# Altium PCB MM_2.0_pcb.PcbDoc (part 1 of 2)
Units mm, origin at the board's own origin, x right, y up, seen from the top; angles counter-clockwise.
Board outline 100 x 100 mm, 4 copper layers (Top_Layer, INT_L1_GND, INT_L2_GND, Bottom_Layer), stack 1.586 mm thick; 74 components, 72 nets, 343 pads, 105 vias.
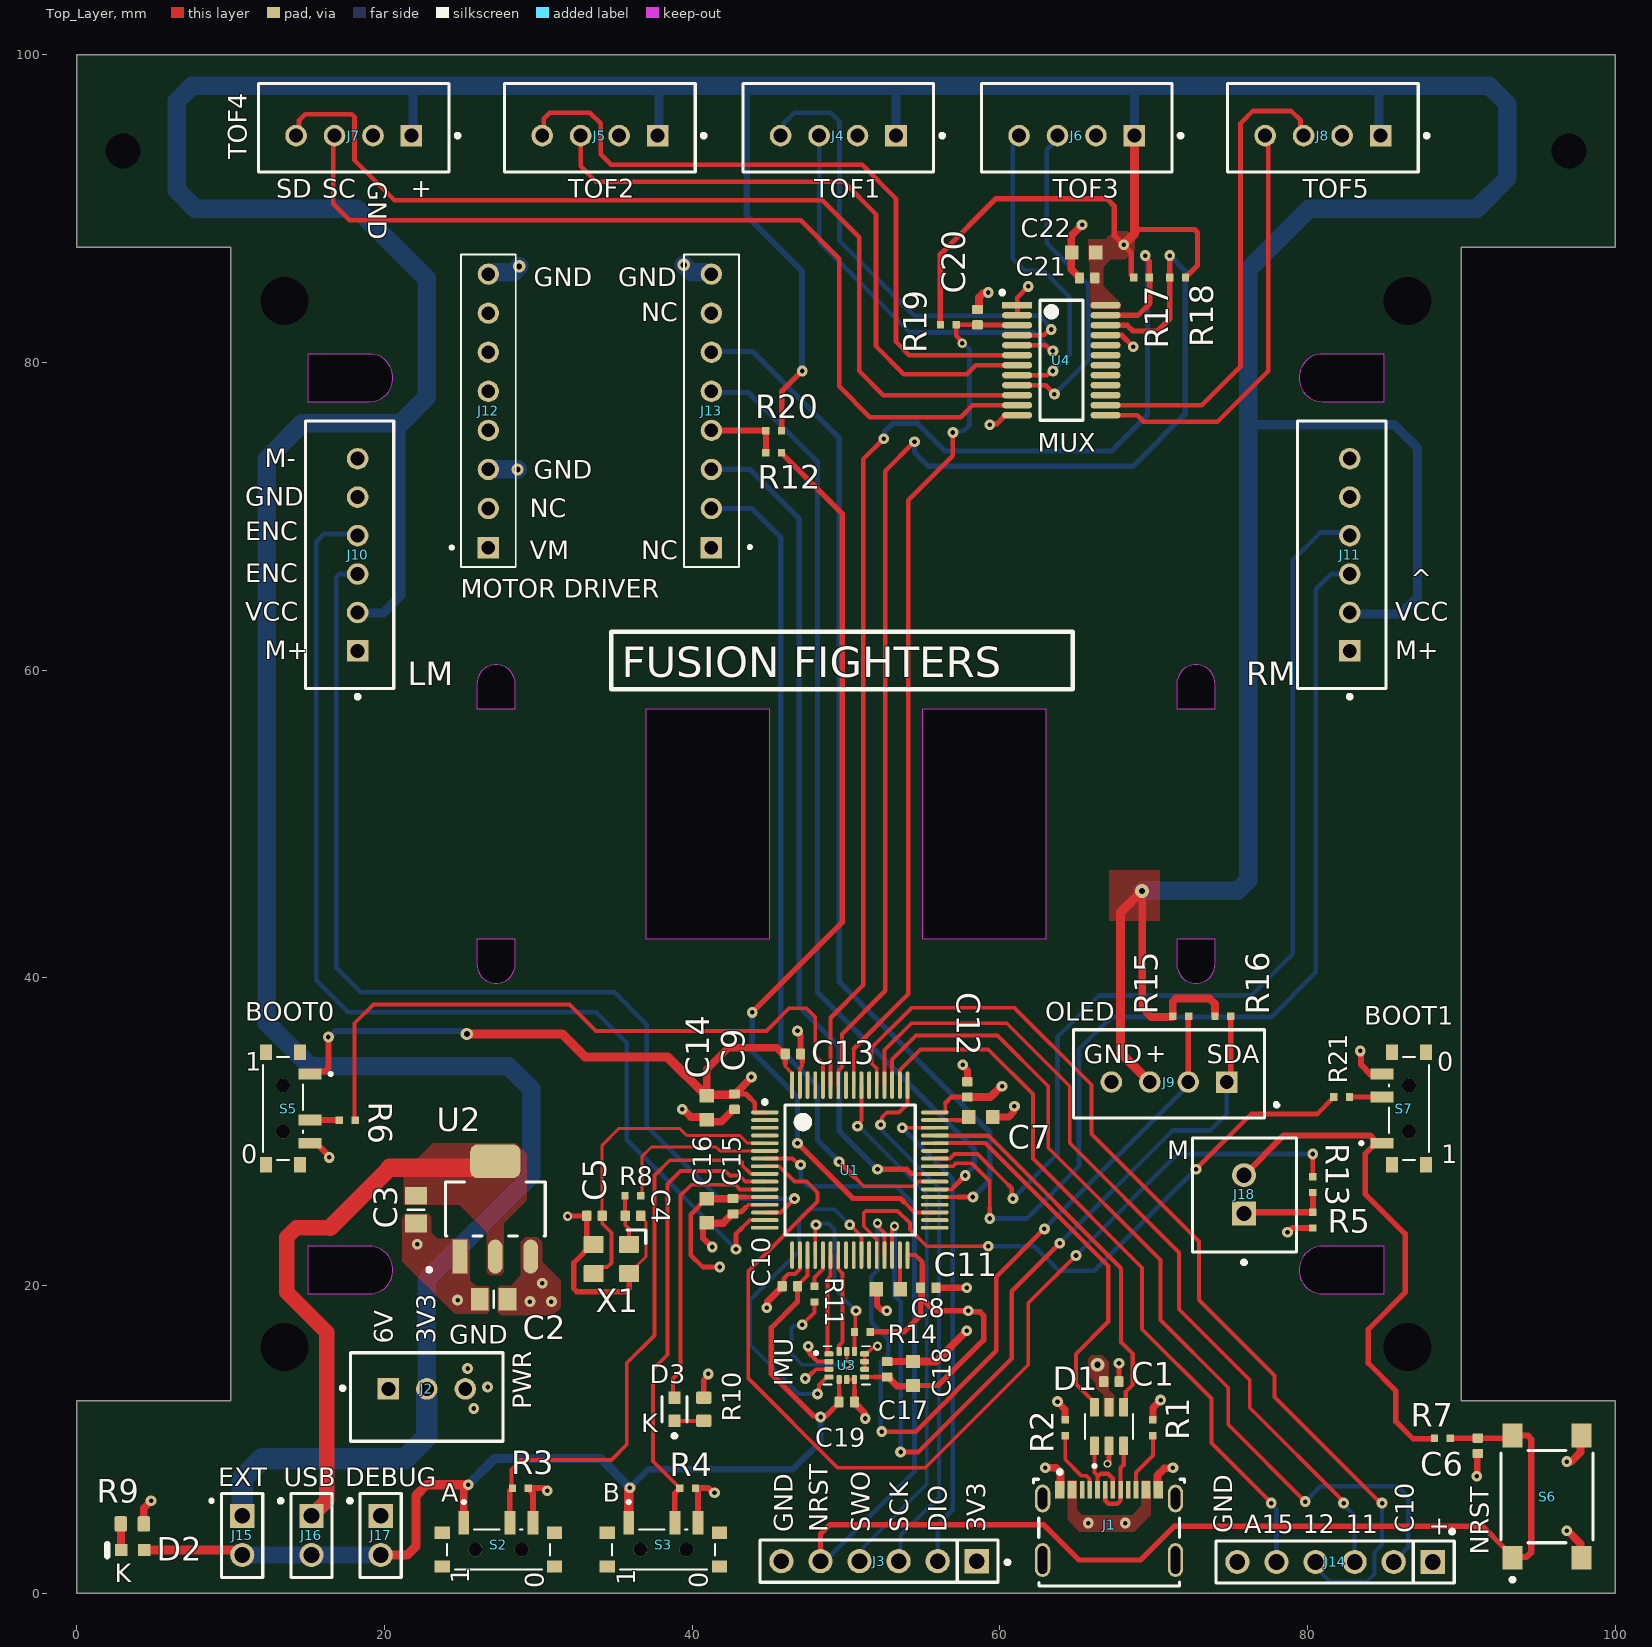
[diagram p0: Top_Layer view]
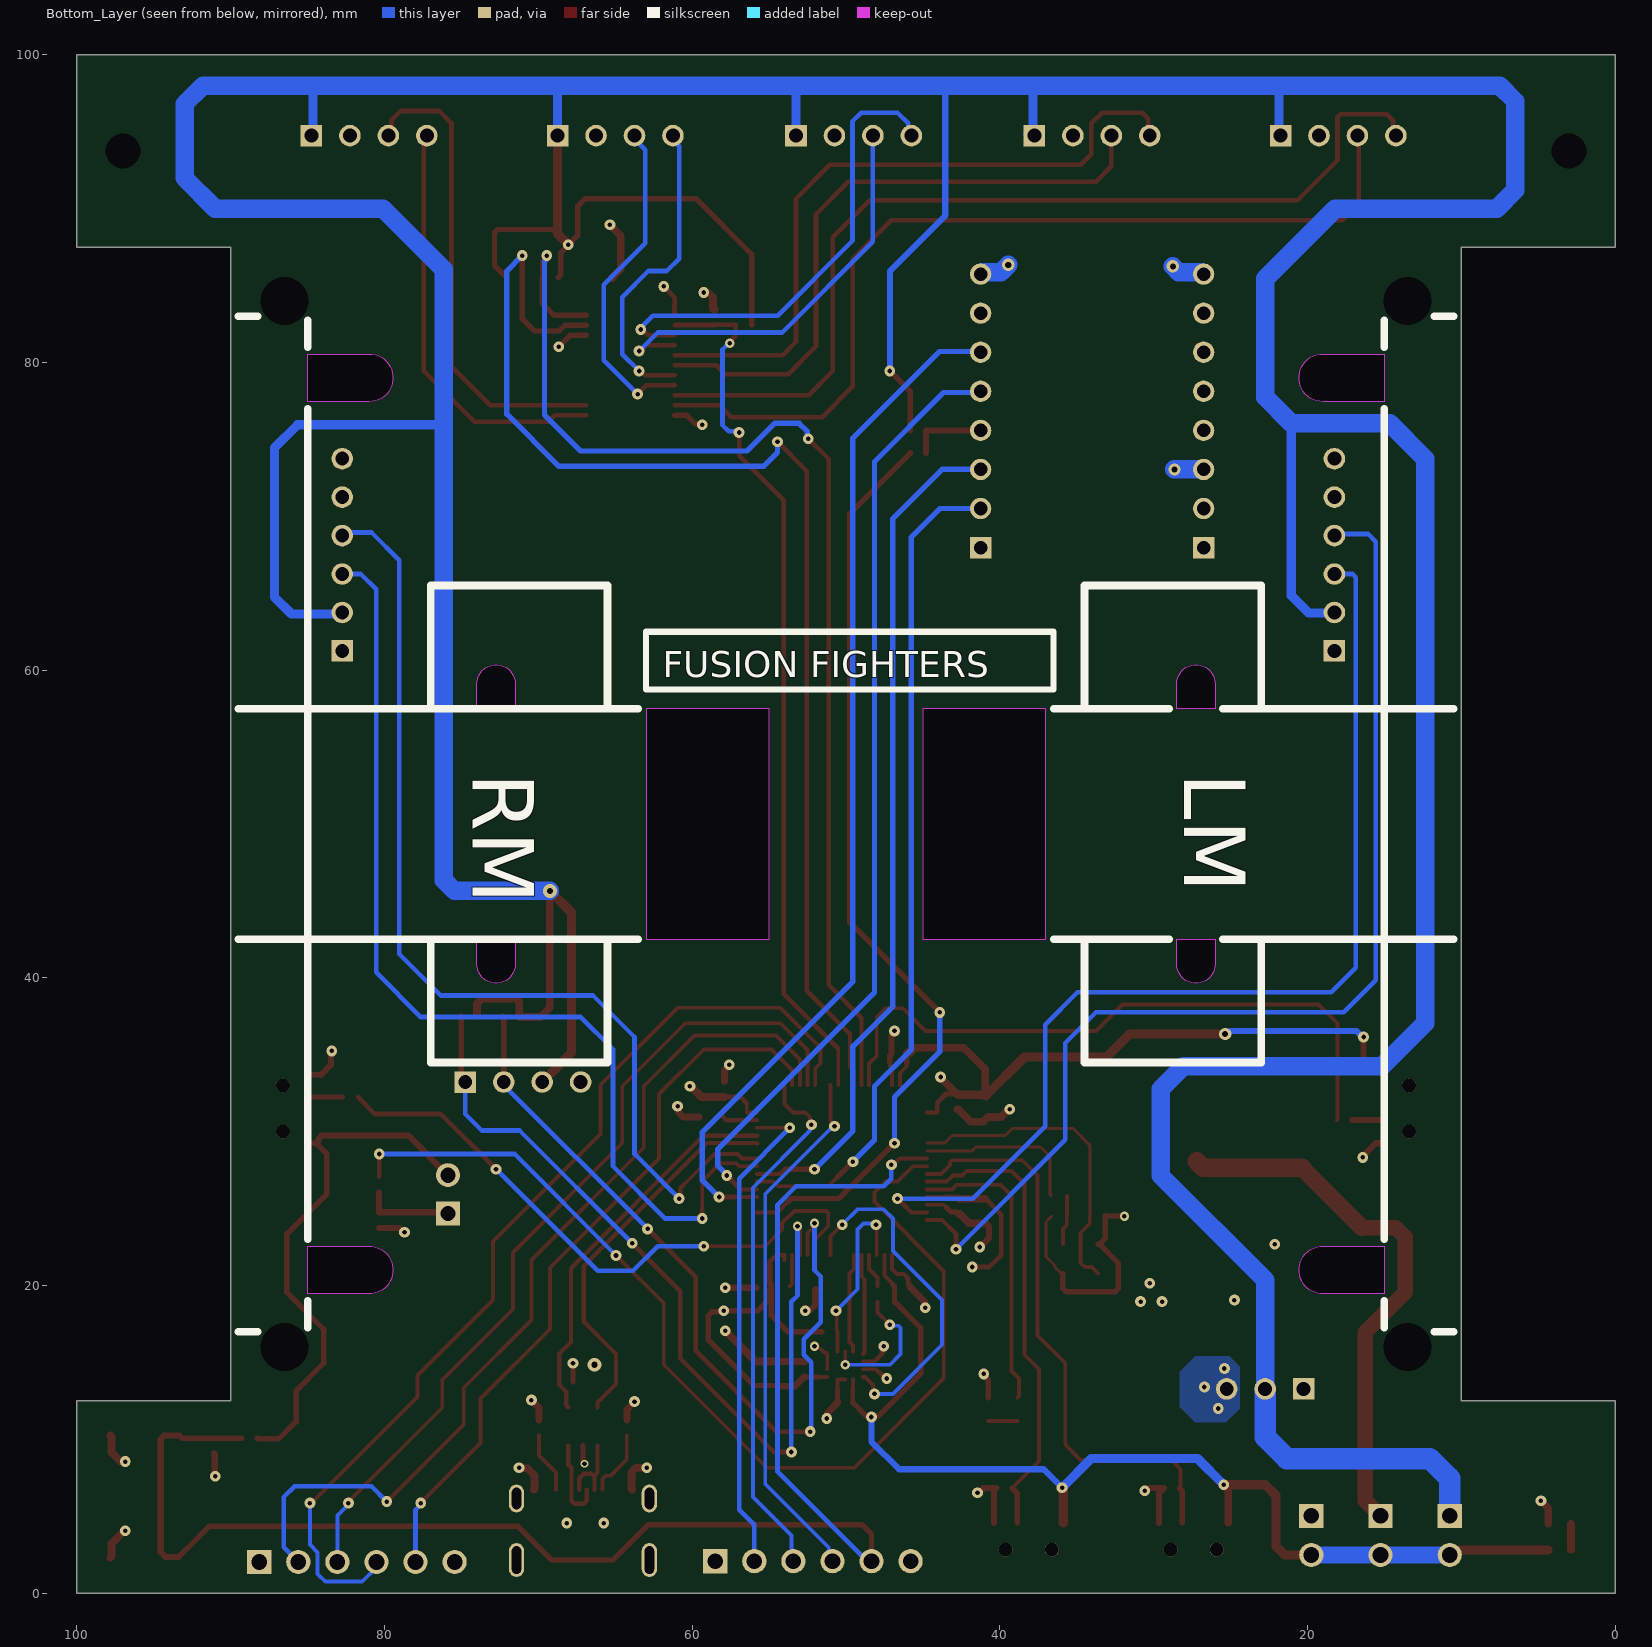
[diagram p1: Bottom_Layer view, seen from below]
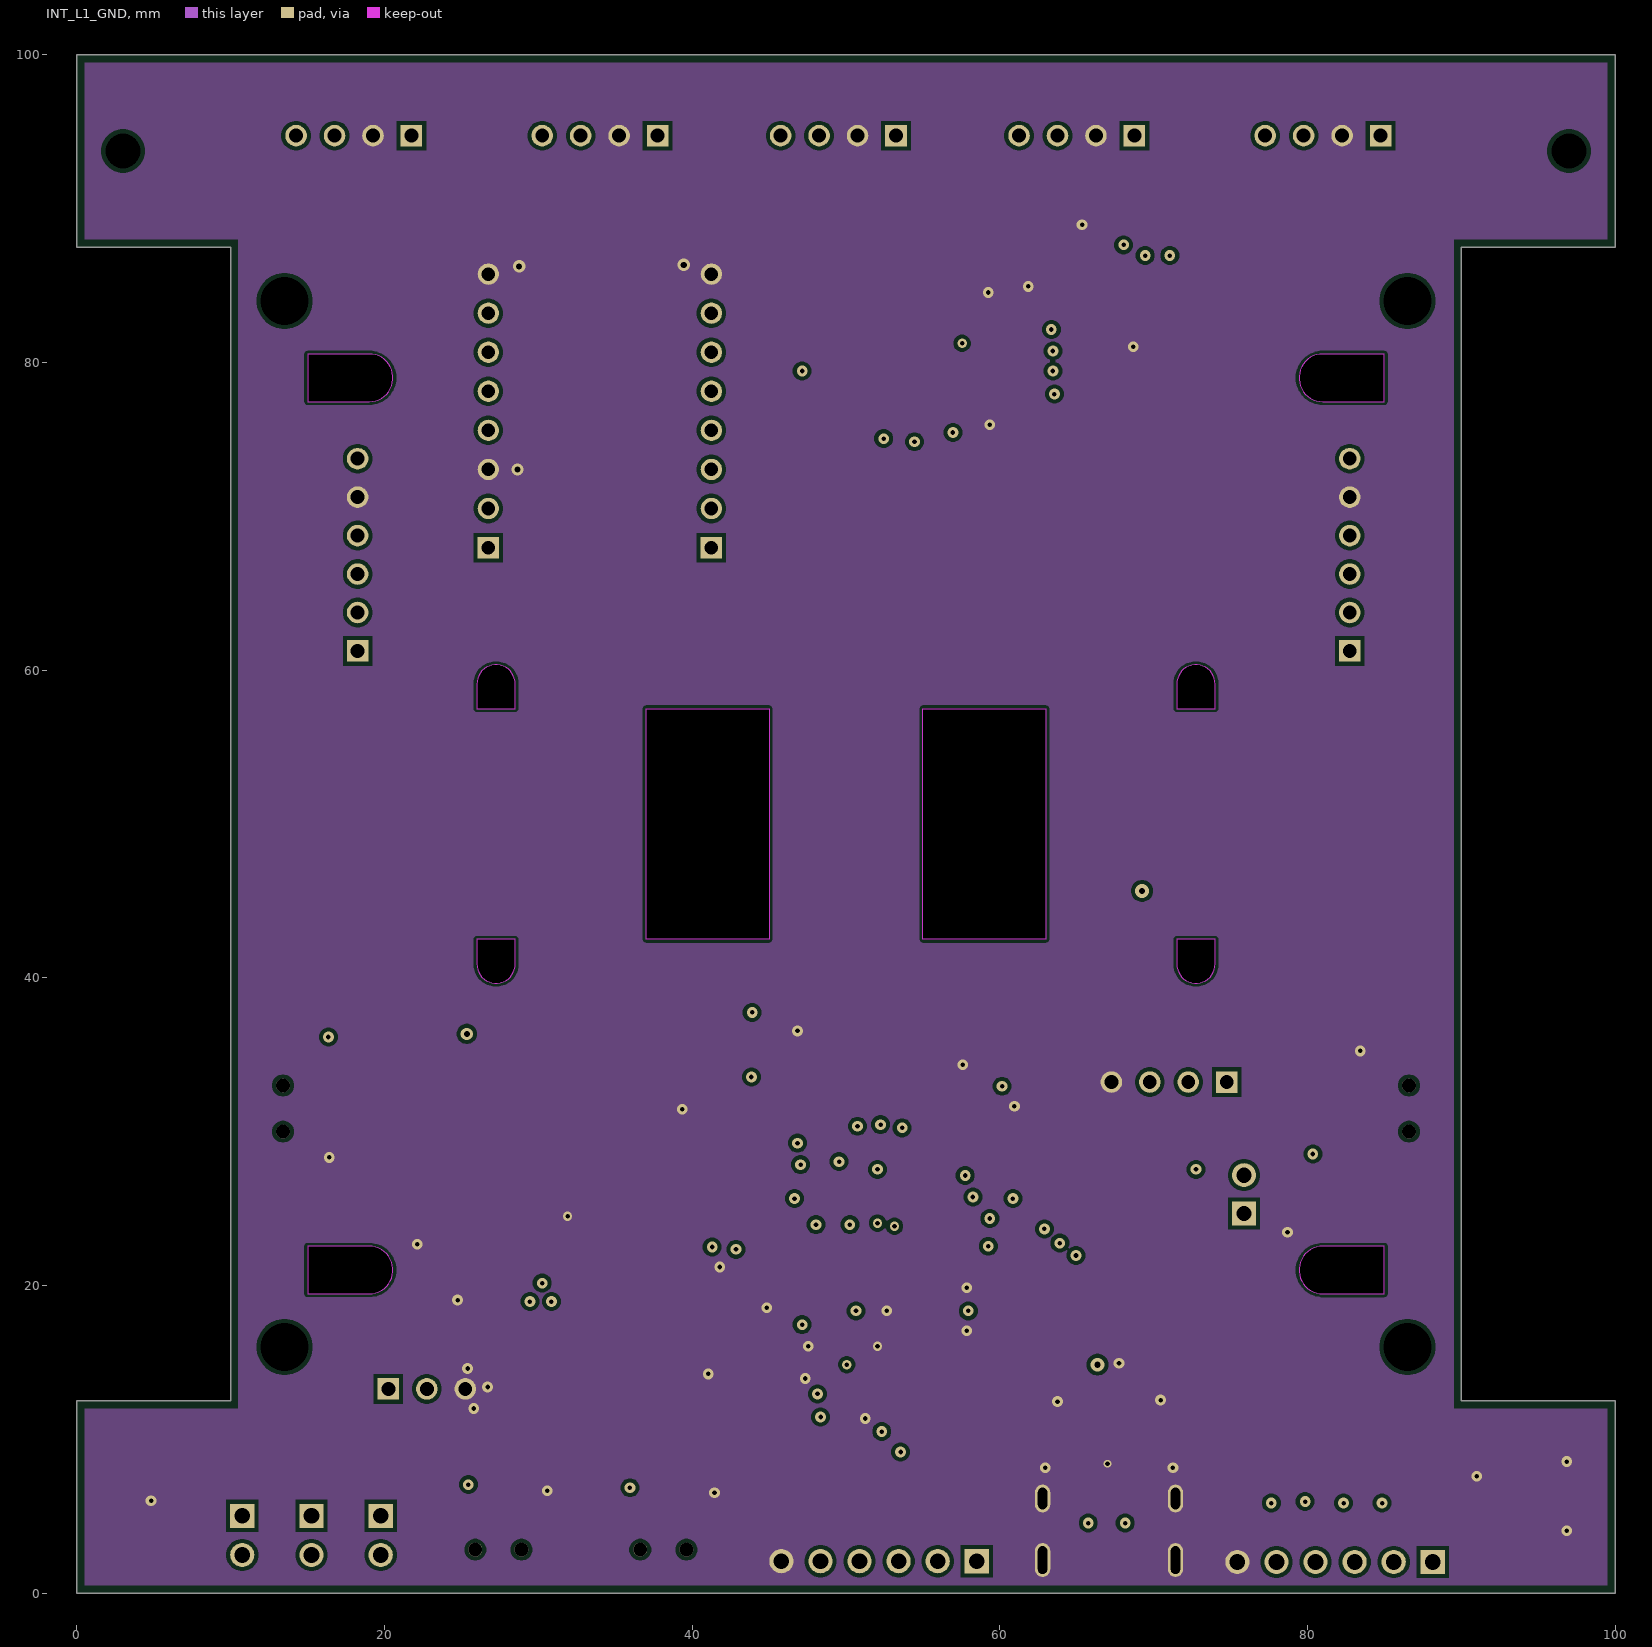
[diagram p2: INT_L1_GND]
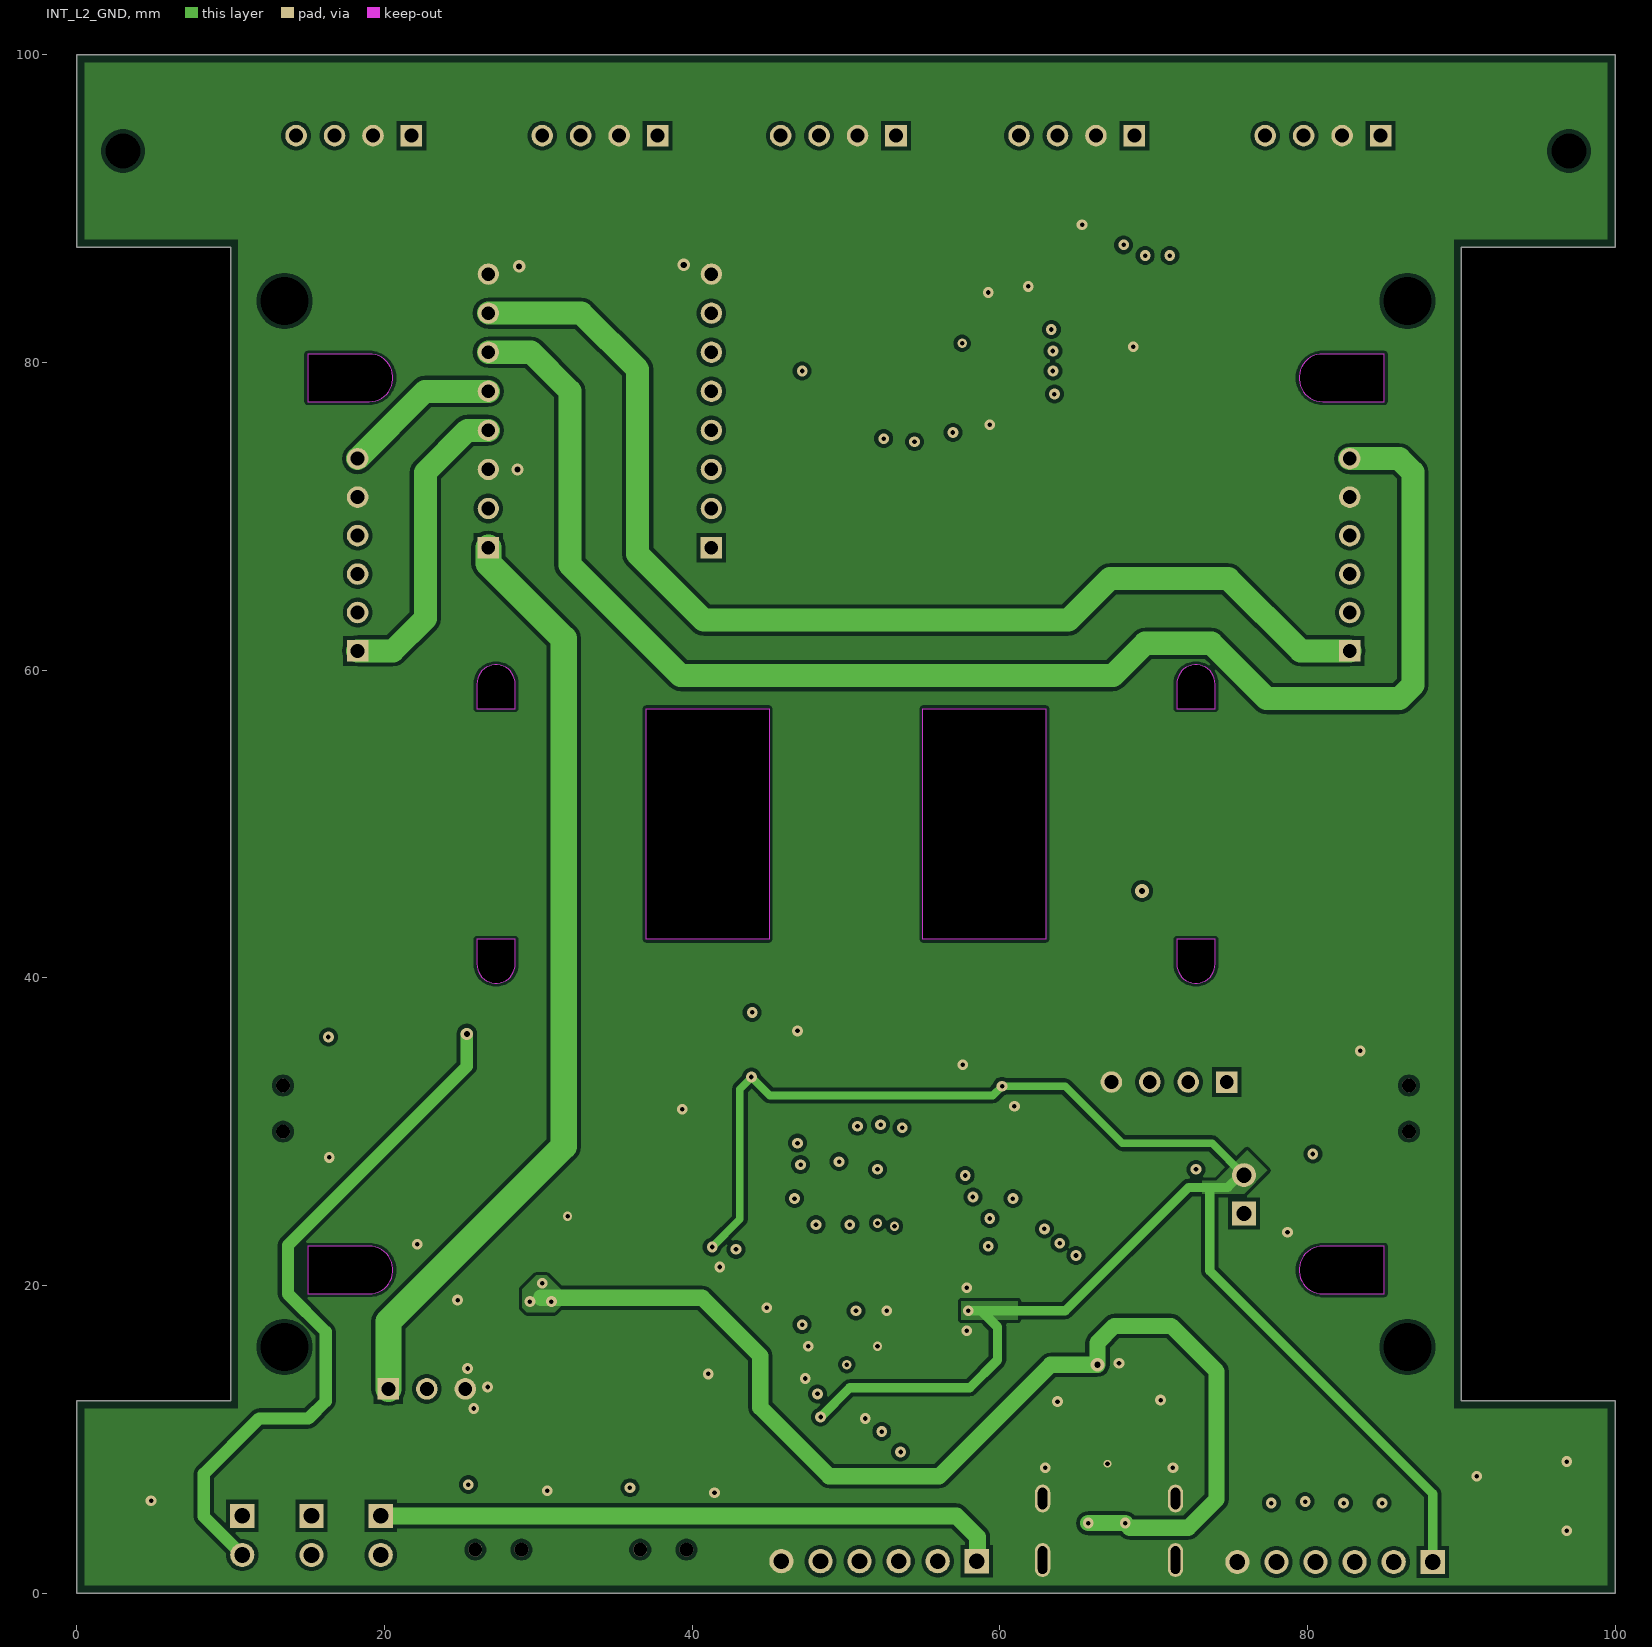
[diagram p3: INT_L2_GND]
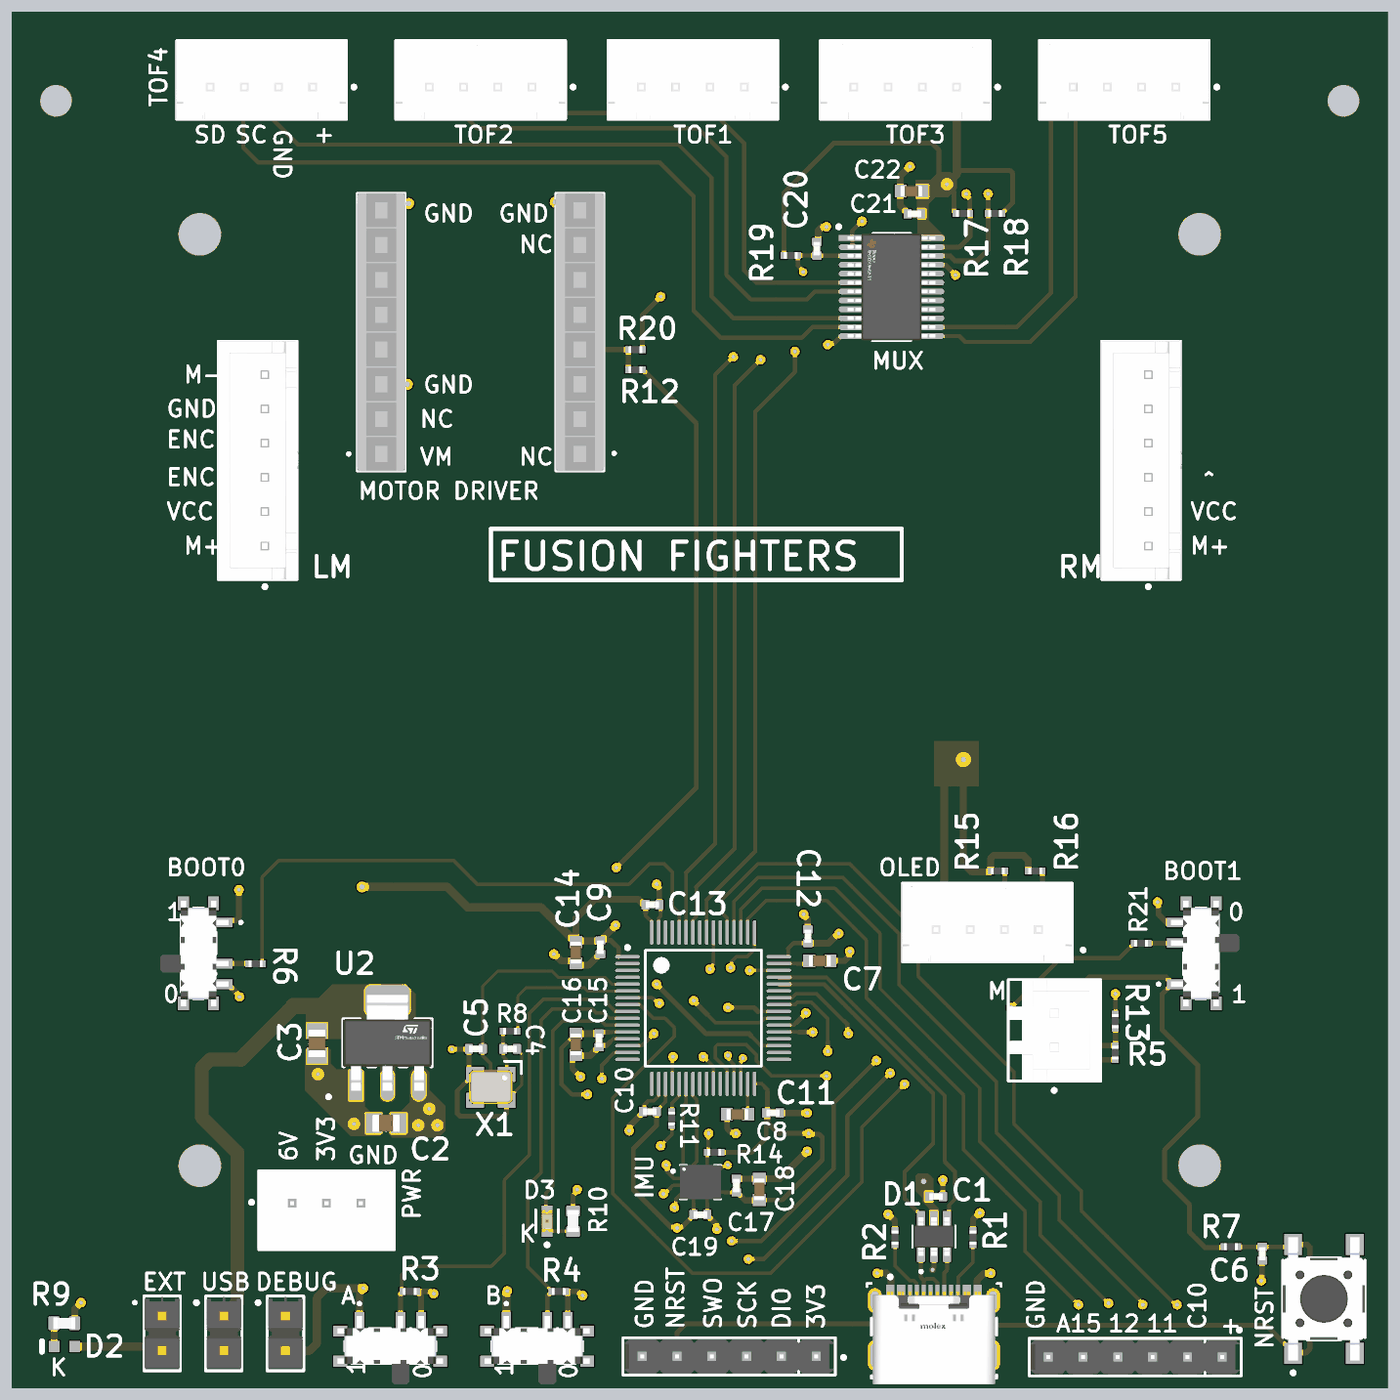
[diagram p5: 3D render of the assembled board from above, using the file's embedded part models]

## Layer stack, top to bottom
Top Solder: solder mask 0.0254, SM-001, Dk 4
Top_Layer: signal copper 0.035
Dielectric 1: prepreg 0.2104, PP-017, Dk 4.4
INT_L1_GND: signal copper 0.0152
Dielectric 3: core 1.065, Core-039, Dk 4.6
INT_L2_GND: signal copper 0.0152
Dielectric 5: prepreg 0.2104, PP-017, Dk 4.4
Bottom_Layer: signal copper 0.035
Bottom Solder: solder mask 0.0254, SM-001, Dk 4

## Board outline
0,0 0,12.5 10,12.5 10,87.5 0,87.5 0,100 100,100 100,87.5 90,87.5 90,12.5 100,12.5 100,0
cut-out: 81,77.454 85,77.454 85,80.554 81,80.554 ccw(c81,79.004)
cut-out: 81,19.454 85,19.454 85,22.554 81,22.554 ccw(c81,21.004)
cut-out: 15,19.455 19,19.455 ccw(c19,21.005) 19,22.555 15,22.555
cut-out: 15,77.455 19,77.455 ccw(c19,79.005) 19,80.555 15,80.555
cut-out: 71.5,40.9 ccw(c72.75,40.9) 74,40.9 74,42.5 71.5,42.5
cut-out: 71.5,57.5 74,57.5 74,59.1 ccw(c72.75,59.1) 71.5,59.1
cut-out: 26,40.9 ccw(c27.25,40.9) 28.5,40.9 28.5,42.5 26,42.5
cut-out: 26,57.5 28.5,57.5 28.5,59.1 ccw(c27.25,59.1) 26,59.1
cut-out: 37,42.5 37,57.5 45,57.5 45,42.5
cut-out: 55,42.5 55,57.5 63,57.5 63,42.5

## Design rules (kind name [scope] priority, off if disabled: settings)
Clearance [All] p1: gap=0.2 ignorepadtopadclearanceinfootprint=FALSE except(0: Arc-Hole Track-Hole SMDPad-Hole THPad-Hole Via-Hole Fill-Hole Poly-Hole Region-Hole Text-Hole; 0.15: SMDPad-SMDPad; 0.25: Arc-THPad Arc-Via Arc-Fill Arc-Poly Arc-Region Track-THPad Track-Via Track-Fill Track-Poly Track-Region SMDPad-THPad SMDPad-Via THPad-THPad THPad-Via THPad-Fill THPad-Poly THPad-Region Via-Via Via-Fill Via-Poly Via-Region)
DiffPairsRouting [All] p1: maxlimit=0.254 minlimit=0.203 mostfreqgap=0.254 toplayer_maxgap=0.203 toplayer_prefgap=0.203 toplayer_minwidth=0.281 toplayer_maxwidth=0.281 toplayer_prefwidth=0.281 bottomlayer_maxgap=0.203 bottomlayer_prefgap=0.203 bottomlayer_minwidth=0.281 bottomlayer_maxwidth=0.281 bottomlayer_prefwidth=0.281 impedanceprofiledriven=TRUE impedanceprofileid={6DC354BC-8C8C-444D-A349-3783D0DCF40A} impedanceprofilevalue=90.000000 maxuncoupledlength=12.7
HoleSize [All] p1: absolutevalues=TRUE maxlimit=6.3 minlimit=0.15 maxpercent=80.000 minpercent=20.000
HoleToHoleClearance [All] p1: gap=0.25 allowstackedmicrovias=TRUE
MinimumSolderMaskSliver [All] p1: minsoldermaskwidth=0.12
PlaneClearance [All] p1: clearance=0.45
PlaneConnect [All] p1: planeconnectstyle=Relief reliefexpansion=0.5 reliefentries=4 reliefconductorwidth=0.25 reliefairgap=0.25
PolygonConnect [All] p1: connectstyle=Direct reliefconductorwidth=0.254 reliefentries=4 polygonreliefangle="90 Angle" airgapwidth=0.254
RoutingVias [All] p1: holewidth=0.3 width=0.7 viastyle="Through Hole" minholewidth=0.3 minwidth=0.4 maxholewidth=0.7 maxwidth=1
SilkToSilkClearance [All] p1: silktosilkclearance=0.25
SilkToSolderMaskClearance [IsPad] p1: minsilkscreentomaskgap=0.25 clearancetoexposedcopper=TRUE
SolderMaskExpansion [All] p1: expansion=0.1 istentingtop=FALSE
UnRoutedNet [All] p1: checkbadconnections=TRUE
Width [All] p1: maxlimit=2 minlimit=0.2 preferedwidth=2 toplayer_maxwidth=1.8 toplayer_prefwidth=0.3 midlayer1_minwidth=0.254 midlayer1_maxwidth=0.254 midlayer1_prefwidth=0.254 bottomlayer_maxwidth=1.8 bottomlayer_prefwidth=0.3 minimp=50.000000 maximp=50.000000 favimp=50.000000
21 further rules are at their usual default settings.

## Classes and differential pairs
differential pair class ESD_DIFF_USB: ESD_USB_D
differential pair class DIFF_USB: USB_D
differential pair USB_D: +USB_D_P -USB_D_N
differential pair ESD_USB_D: +ESD_USB_D_P -ESD_USB_D_N

## Components (designator, comment, footprint, x,y, rotation, side; value= is the part's Value field where it differs from the comment)
C1 "100n, ?V" CAP_0402 67.25,13.75 r180 top
C2 "10u" CAPC2012X140N 27.1,19.1 r180 top
C3 "10u" CAPC2012X140N 22.05,24.925 r270 top
C4 "8p" CAP_0402 36.15,24.525 r180 top
C5 "8p" CAP_0402 33.65,24.525 r0 top
C6 "100n" CAP_0402 91.075,9.575 r90 top
C7 "2.2u" "CL10A105KO8NNNC 4.7u 16V 603" 58.77,30.95 r0 top
C8 "2.2u" "CL10A105KO8NNNC 4.7u 16V 603" 52.75,19.75 r180 top
C9 "100n" CAP_0402 42.75,31.95 r90 top
C10 "100n" CAP_0402 46.35,19.95 r0 top
C11 "100n" CAP_0402 55.35,19.85 r180 top
C12 "100n" CAP_0402 57.89,32.75 r270 top
C13 "100n" CAP_0402 46.55,35.05 r180 top
C14 "4.7u" "CL10A105KO8NNNC 4.7u 16V 603" 40.95,31.55 r270 top
C15 "100n" CAP_0402 42.65,25.15 r270 top
C16 "1u" "CL10A105KO8NNNC 1u 16V 603" 40.95,24.85 r90 top
C17 "100n" CAP_0402 52.675,14.55 r270 top
C18 "2.2u" "CL10A105KO8NNNC 4.7u 16V 603" 54.35,14.275 r90 top
C19 "10n" CAP_0402 50.05,12.425 r180 top
C20 "100n" CAP_0402 58.55,82.95 r270 top
C21 "100n" CAP_0402 65.675,85.5 r0 top
C22 "2.2u" "CL10A105KO8NNNC 4.7u 16V 603" 65.45,87.15 r180 top
D1 "USBLC6-2SC6" SOT95P280X145-6N 67.1,10.825 r90 top
D2 "LTST-C190KSKT" LTST-C190KSKT_V 3.625,2.8 r180 top
D3 "LTST-C190KRKT" FP-LTST-C190KRKT-MFG 38.85,11.95 r90 top
J1 "217179-0001" "FP-2171790001-MFG USB-C 2.0" 67.1,3.3 r0 top locked
J2 "B3B-XH-A(LF)(SN)" FP-B3B-XH-A_LF_SN-MFG 22.75,12.75 r0 top locked
J3 "22-28-4060" FP-22-28-4060-MFG 52.15,2.075 r180 top locked
J4 "B4B-XH-A(LF)(SN)" FP-B4B-XH-A_LF_SN-MFG 49.5,95.275 r0 top locked
J5 "B4B-XH-A(LF)(SN)" FP-B4B-XH-A_LF_SN-MFG 34,95.275 r0 top locked
J6 "B4B-XH-A(LF)(SN)" FP-B4B-XH-A_LF_SN-MFG 65,95.275 r0 top locked
J7 "B4B-XH-A(LF)(SN)" FP-B4B-XH-A_LF_SN-MFG 18,95.275 r0 top locked
J8 "B4B-XH-A(LF)(SN)" FP-B4B-XH-A_LF_SN-MFG 81,95.275 r0 top locked
J9 "B4B-XH-A(LF)(SN)" FP-B4B-XH-A_LF_SN-MFG 71,33.75 r0 top locked
J10 "B6B-XH-A(LF)(SN)" FP-B6B-XH-A_LF_SN-MFG 17.725,67.5 r90 top locked
J11 "B6B-XH-A(LF)(SN)" FP-B6B-XH-A_LF_SN-MFG 82.225,67.5 r90 top locked
J12 "5-535541-6" TE_5-535541-6 26.75,76.86 r90 top locked
J13 "5-535541-6" TE_5-535541-6 41.25,76.86 r90 top locked
J14 "22-28-4060" FP-22-28-4060-MFG 81.795,2.025 r180 top locked
J15 "TSW-102-07-F-S" FP-TSW-102-07-F-S-MFG 10.75,3.75 r270 top locked
J16 "TSW-102-07-F-S" FP-TSW-102-07-F-S-MFG 15.25,3.75 r270 top locked
J17 "TSW-102-07-F-S" FP-TSW-102-07-F-S-MFG 19.75,3.75 r270 top locked
J18 "B2B-XH-2(LF)(SN)" FP-B2B-XH-2_LF_SN-MFG 75.9,25.875 r270 top locked
R1 "5.1K" "RES_ERJ2RKF1002X 100K 100mW 402"#1 69.95,10.75 r270 top
R2 "5.1K" "RES_ERJ2RKF1002X 100K 100mW 402"#1 64.25,10.75 r270 top
R3 "10K" "RES_ERJ2RKF1002X 100K 100mW 402"#1 28.825,6.825 r180 top
R4 "10K" "RES_ERJ2RKF1002X 100K 100mW 402"#1 39.7,6.825 r180 top
R5 "10K" "RES_ERJ2RKF1002X 100K 100mW 402"#1 80.35,24.25 r90 top
R6 "10K" "RES_ERJ2RKF1002X 100K 100mW 402"#1 17.575,30.75 r0 top
R7 "10K" "RES_ERJ2RKF1002X 100K 100mW 402"#1 88.775,10.075 r180 top
R8 "0R" "RES_ERJ2RKF1002X 100K 100mW 402"#1 36.15,25.825 r180 top
R9 "750R" RES_0603 3.6,4.5 r180 top
R10 "750R" RES_0603 40.75,11.95 r270 top
R11 "0R" "RES_ERJ2RKF1002X 100K 100mW 402"#1 47.95,19.438 r90 top
R12 "0R" "RES_ERJ2RKF1002X 100K 100mW 402"#1 45.3,74.125 r180 top locked
R13 "0R" "RES_ERJ2RKF1002X 100K 100mW 402"#1 80.35,26.55 r90 top
R14 "30K" "RES_ERJ2RKF1002X 100K 100mW 402"#2 51.066,16.98 r0 top
R15 "10K" "RES_ERJ2RKF1002X 100K 100mW 402"#1 71.762,37.5 r180 top
R16 "10K" "RES_ERJ2RKF1002X 100K 100mW 402"#1 74.5,37.5 r180 top
R17 "4.7K" "RES_ERJ2RKF1002X 100K 100mW 402"#1 69.212,85.525 r180 top
R18 "4.7K" "RES_ERJ2RKF1002X 100K 100mW 402"#1 71.562,85.525 r0 top
R19 "10K" "RES_ERJ2RKF1002X 100K 100mW 402"#1 56.65,82.45 r180 top
R20 "0R" "RES_ERJ2RKF1002X 100K 100mW 402"#1 45.3,75.575 r0 top locked
R21 "10K" "RES_ERJ2RKF1002X 100K 100mW 402"#1 82.225,32.25 r180 top
S2 "SSSS811101" SW_SSSS811101 27.4,2.825 r0 top locked
S3 "SSSS811101" SW_SSSS811101 38.125,2.825 r0 top locked
S5 "SSSS811101" SW_SSSS811101 13.4,31.5 r270 top locked
S6 "SW1" FP-PTS645SM43SMTR92LFS-MFG 95.575,6.275 r90 top locked
S7 "SSSS811101" SW_SSSS811101 86.6,31.5 r90 top locked
U1 "STM32F405RGT6" STM-LQFP64_L 50.25,27.5 r0 top locked
U2 "LDL1117S33R" FP-SOT223-0046067-IPC_A 27.2,24.975 r90 top locked
U3 "ICM-42688-P" PQFN50P300X250X97-14N 50.05,14.8 r0 top locked
U4 "TCA9548APWR" FP-PW0024A-IPC_A 64,80.15 r0 top locked
X1 "24MHz" XTAL_3225 34.75,21.725 r180 top

## Footprints (in the part's own frame and the unit in brackets; to place one, negate y for a bottom-side part, rotate by r counter-clockwise, add the part's x,y. Pads: shape width x height; smd on the part's side, far side on the other; paste and mask are expansions set on the pad)
CAP_0402 [mm]
  rrect25% 0.6x0.7 smd: 1(-0.5,0) 2(0.5,0)
  body extent -0.5,-0.26 0.5,0.26, height 0.37
CAPC2012X140N [mm] "10uF 16V 805"
  rect 1.15x1.45 smd: 1(-0.9,0) 2(0.9,0)
  silkscreen extent 0,-0.55 0,0.55, body extent -1,-0.63 1,0.63, height 1.35
"CL10A105KO8NNNC 1u 16V 603" [mm]
  rect 0.87x0.93 smd: 1(-0.78,0) 2(0.78,0)
  body extent -0.8,-0.4 0.8,0.4, height 0.9
"CL10A105KO8NNNC 4.7u 16V 603" [mm]
  rect 0.87x0.93 smd: 1(-0.78,0) 2(0.78,0)
  body extent -0.8,-0.4 0.8,0.4, height 0.9
FP-22-28-4060-MFG [mm] "6P 2.54mm H"
  rect 1.57x1.57 hole 1.02 paste-1000 mask+0: 1(-6.35,0)
  round 1.57 hole 1.02 paste-1000 mask+0: 2(-3.81,0) 3(-1.27,0) 4(1.27,0) 5(3.81,0) 6(6.35,0)
  silkscreen extent -8.48,-1.37 7.75,1.37, body extent -7.85,-1.47 7.85,1.47, height 0.25
"FP-2171790001-MFG USB-C 2.0" [mm]
  rect 0.6x1.15 smd paste+0 mask+0.025: A1B12(-3.2,3.425) A4B9(-2.4,3.425) B1A12(3.2,3.425) B4A9(2.4,3.425)
  rect 0.3x1.15 smd paste+0 mask+0.025: A5(-1.25,3.425) A6(-0.25,3.425) A7(0.25,3.425) A8(1.25,3.425) B5(1.75,3.425) B6(0.75,3.425) B7(-0.75,3.425) B8(-1.75,3.425)
  rrect100% 1x1.8 hole 1.4 slot 0.6 at 0 deg paste-2539.97 mask+0: S1(-4.32,2.85) S2(4.32,2.85)
  rrect100% 1x2.2 hole 1.8 slot 0.6 at 0 deg paste-2539.97 mask+0: S3(-4.32,-1.15) S4(4.32,-1.15)
  silkscreen extent -4.57,-2.83 4.57,4.7, body extent -4.47,-3.25 4.47,3.5, height 3.36
FP-B2B-XH-2_LF_SN-MFG [mm]
  rect 1.55x1.55 hole 1 paste-1000 mask+0: 1(1.2,-0.025)
  round 1.55 hole 1 paste-1000 mask+0: 2(-1.3,-0.025)
  silkscreen extent -3.7,-3.37 4.5,3.37, body extent -3.8,-3.47 3.8,3.47, height 0.25
FP-B3B-XH-A_LF_SN-MFG [mm]
  rect 1.4x1.4 hole 0.9 paste-1000 mask+0: 1(-2.5,0.525)
  round 1.4 hole 0.9 paste-1000 mask+0: 2(0,0.525) 3(2.5,0.525)
  silkscreen extent -5.6,-2.88 4.95,2.88, body extent -5.05,-2.98 5.05,2.98, height 0.25
FP-B4B-XH-A_LF_SN-MFG [mm] "4P JST"
  rect 1.4x1.4 hole 0.9 paste-1000 mask+0: 1(3.75,-0.525)
  round 1.4 hole 0.9 paste-1000 mask+0: 2(1.25,-0.525) 3(-1.25,-0.525) 4(-3.75,-0.525)
  silkscreen extent -6.2,-2.88 6.88,2.88, body extent -6.3,-2.98 6.3,2.98, height 0.25
FP-B6B-XH-A_LF_SN-MFG [mm] "6P JST"
  rect 1.4x1.4 hole 0.9 paste-1000 mask+0: 1(-6.25,-0.525)
  round 1.4 hole 0.9 paste-1000 mask+0: 2(-3.75,-0.525) 3(-1.25,-0.525) 4(1.25,-0.525) 5(3.75,-0.525) 6(6.25,-0.525)
  silkscreen extent -9.35,-2.88 8.7,2.88, body extent -8.8,-2.98 8.8,2.98, height 0.25
FP-LTST-C190KRKT-MFG [mm] "603 RED LED"
  rect 0.8x0.8 smd paste+0 mask+0.06: 1(-0.75,0) 2(0.75,0)
  silkscreen extent -1.85,-0.82 0.82,0.82, body extent -1.25,-0.55 1.25,0.55, height 0.25
FP-PTS645SM43SMTR92LFS-MFG [mm]
  rect 1.55x1.3 smd paste+0 mask+0.1: 1(-3.975,2.25) 2(3.975,2.25) 3(-3.975,-2.25) 4(3.975,-2.25)
  silkscreen extent -5.52,-3 3,3, body extent -4.5,-3 4.5,3, height 4.3
FP-PW0024A-IPC_A [mm] "I2C MUX"
  rect 1.955x0.421 smd paste+0 mask+0.04: 1(-2.875,3.575)
  rrect100% 1.955x0.421 smd paste+0 mask+0.04: 2(-2.875,2.925) 3(-2.875,2.275) 4(-2.875,1.625) 5(-2.875,0.975) 6(-2.875,0.325) 7(-2.875,-0.325) 8(-2.875,-0.975) 9(-2.875,-1.625) 10(-2.875,-2.275) 11(-2.875,-2.925) 12(-2.875,-3.575) 13(2.875,-3.575) 14(2.875,-2.925) 15(2.875,-2.275) 16(2.875,-1.625) 17(2.875,-0.975) 18(2.875,-0.325) 19(2.875,0.325) 20(2.875,0.975) 21(2.875,1.625) 22(2.875,2.275) 23(2.875,2.925) 24(2.875,3.575)
  silkscreen extent -3.97,-3.9 1.4,4.52, body extent -4.35,-4.4 4.35,4.4, height 0.25
FP-SOT223-0046067-IPC_A [mm]
  rect 2.204x0.96 smd paste+0: 1(-3.1,2.3)
  rrect100% 2.204x0.96 smd paste+0: 2(-3.1,0) 3(-3.1,-2.3)
  rrect44% 2.204x3.26 smd paste+0: 4(3.1,0)
  silkscreen extent -4.07,-3.25 1.75,4.42, body extent -4.7,-3.75 4.7,3.75, height 0.25
FP-TSW-102-07-F-S-MFG [mm] "2P Header"
  rect 1.57x1.57 hole 1.02 paste-1000 mask+0: 1(-1.27,0)
  round 1.57 hole 1.02 paste-1000 mask+0: 2(1.27,0)
  silkscreen extent -2.73,-2.07 2.73,1.34, body extent -2.83,-1.44 2.83,1.44, height 0.25
LTST-C190KSKT_V [mm] "SMD, 2-Leads, Body 1.6x0.8mm, LED 603"
  rect 0.8x0.8 smd: 1(-0.75,0) 2(0.75,0)
  silkscreen extent 1.65,-0.4 1.65,0.4, body extent -0.8,-0.4 0.8,0.4, height 0.9
PQFN50P300X250X97-14N [mm] "ICM-42688-P"
  rrect50% 0.59x0.35 smd mask+0.015: 1(-1.165,0.75) 2(-1.165,0.25) 3(-1.165,-0.25) 4(-1.165,-0.75) 8(1.165,-0.75) 9(1.165,-0.25) 10(1.165,0.25) 11(1.165,0.75)
  rrect50% 0.35x0.59 smd mask+0.015: 5(-0.5,-0.915) 6(0,-0.915) 7(0.5,-0.915) 12(0.5,0.915) 13(0,0.915) 14(-0.5,0.915)
  silkscreen extent -2.1,-1.25 1.5,1.25, body extent -1.5,-1.25 1.5,1.25, height 0.97
RES_0603 [mm]
  rrect25% 0.8x1 smd: 1(-0.75,0) 2(0.75,0)
  body extent -0.8,-0.43 0.8,0.43, height 0.52
"RES_ERJ2RKF1002X 100K 100mW 402"#1 [mm]
  rect 0.475x0.5 smd: 1(-0.512,0) 2(0.512,0)
  body extent -0.5,-0.25 0.5,0.25, height 0.35
"RES_ERJ2RKF1002X 100K 100mW 402"#2 [mm]
  rect 0.475x0.5 smd mask+0.1: 1(-0.512,0)
  rect 0.475x0.5 smd: 2(0.512,0)
  body extent -0.5,-0.25 0.5,0.25, height 0.35
SOT95P280X145-6N [mm] "SOT-23-6"
  rrect25% 1.21x0.59 smd: 1(-1.255,0.95) 2(-1.255,0) 3(-1.255,-0.95) 4(1.255,-0.95) 5(1.255,0) 6(1.255,0.95)
  silkscreen extent -2.65,-1.57 0.81,1.57, body extent -1.4,-1.46 1.4,1.46, height 1.4
STM-LQFP64_L [mm] "Thin QFP, 64-Leads, Body 10x10mm, Pitch 0.5mm, IPC High Density"
  oval 1.8x0.25 smd mask+0.035: 1(-5.525,3.75) 2(-5.525,3.25) 3(-5.525,2.75) 4(-5.525,2.25) 5(-5.525,1.75) 6(-5.525,1.25) 7(-5.525,0.75) 8(-5.525,0.25) 9(-5.525,-0.25) 10(-5.525,-0.75) 11(-5.525,-1.25) 12(-5.525,-1.75) 13(-5.525,-2.25) 14(-5.525,-2.75) 15(-5.525,-3.25) 16(-5.525,-3.75) 33(5.525,-3.75) 34(5.525,-3.25) 35(5.525,-2.75) 36(5.525,-2.25) 37(5.525,-1.75) 38(5.525,-1.25) 39(5.525,-0.75) 40(5.525,-0.25) 41(5.525,0.25) 42(5.525,0.75) 43(5.525,1.25) 44(5.525,1.75) 45(5.525,2.25) 46(5.525,2.75) 47(5.525,3.25) 48(5.525,3.75)
  oval 0.25x1.8 smd mask+0.035: 17(-3.75,-5.525) 18(-3.25,-5.525) 19(-2.75,-5.525) 20(-2.25,-5.525) 21(-1.75,-5.525) 22(-1.25,-5.525) 23(-0.75,-5.525) 24(-0.25,-5.525) 25(0.25,-5.525) 26(0.75,-5.525) 27(1.25,-5.525) 28(1.75,-5.525) 29(2.25,-5.525) 30(2.75,-5.525) 31(3.25,-5.525) 32(3.75,-5.525) 50(3.25,5.525) 51(2.75,5.525) 52(2.25,5.525) 53(1.75,5.525) 54(1.25,5.525) 55(0.75,5.525) 56(0.25,5.525) 57(-0.25,5.525) 58(-0.75,5.525) 59(-1.25,5.525) 60(-1.75,5.525) 61(-2.25,5.525) 62(-2.75,5.525) 63(-3.25,5.525) 64(-3.75,5.525)
  oval 0.25x1.8 smd mask+0.06: 49(3.75,5.525)
  silkscreen extent -5.65,-4.23 4.25,4.55, body extent -5,-5 5,5, height 1.6
SW_SSSS811101 [mm] "Slide Switch"
  rect 0.7x1.5 smd: 1(-2.25,1.75) 2(0.75,1.75) 3(2.25,1.75)
  rect 1x0.8 smd: SH1(-3.65,1.1) SH2(3.65,1.1) SH3(-3.65,-1.1) SH4(3.65,-1.1)
  round 0.9 hole 0.9 unplated: ""(-1.5,0) ""(1.5,0)
  silkscreen extent -3.35,-1.3 3.35,3.2, body extent -3.85,-2.8 3.85,2.2, height 1.4
TE_5-535541-6 [mm] "8P Female H"
  rect 1.388x1.388 hole 0.88: 1(-8.89,0)
  round 1.388 hole 0.88: 2(-6.35,0) 3(-3.81,0) 4(-1.27,0) 5(1.27,0) 6(3.81,0) 7(6.35,0) 8(8.89,0)
  silkscreen extent -10.16,-1.78 10.16,2.48, body extent -10.16,-1.78 10.16,1.78, height 6.7
XTAL_3225 [mm]
  rrect10% 1.3x1.1 smd: 1(-1.15,-0.95) 2(1.15,-0.95) 3(1.15,0.95) 4(-1.15,0.95)
  silkscreen extent -2.23,-1.89 -1,-1, body extent -1.6,-1.28 1.6,1.22, height 0.61

## Part data
C1 C4 C5 C6 C9 C10 C11 C12 C13 C15 C17 C19 C20 C21: library part CL05B104KO5NNNC, "0.1 ÂµF Â±10% 16V Ceramic Capacitor X7R 0402 (1005 Metric)", Package="SMD-2-2 Samsung", Check_prices=https://www.snapeda.com/parts/CL05B104KO5NNNC/Samsung/view-part/?ref=eda, MF=Samsung, MP=CL05B104KO5NNNC, SnapEDA_Link=https://www.snapeda.com/parts/CL05B104KO5NNNC/Samsung/view-part/?ref=snap
C2 C3: library part CL21B106KOQNNNE, "10 ÂµF Â±10% 16V Ceramic Capacitor X7R 0805 (2012 Metric)", Package="0805 Samsung", Check_prices=https://www.snapeda.com/parts/CL21B106KOQNNNE/Samsung+Electro-Mechanics/view-part/?ref=eda, MF="Samsung Electro-Mechanics", MP=CL21B106KOQNNNE, SnapEDA_Link=https://www.snapeda.com/parts/CL21B106KOQNNNE/Samsung+Electro-Mechanics/view-part/?ref=snap
C7 C8 C14 C18 C22: library part CL10A475KO8NNNC, "4.7 ÂµF Â±10% 16V Ceramic Capacitor X5R 0603 (1608 Metric)", Package="1608-2 SAMSUNG", Check_prices=https://www.snapeda.com/parts/CL10A475KO8NNNC/Samsung/view-part/?ref=eda, MF="Samsung Electro-Mechanics", MP=CL10A475KO8NNNC, SnapEDA_Link=https://www.snapeda.com/parts/CL10A475KO8NNNC/Samsung/view-part/?ref=snap
C16: library part CL10A105KO8NNNC, "1uF; 16V; X5R; MLCC; Â±10%; SMD; Capacitor: ceramic; 0603; -55Ã·85Â°C", Package="1608-2 SAMSUNG", Check_prices=https://www.snapeda.com/parts/CL10A105KO8NNNC/Samsung/view-part/?ref=eda, MF="Samsung Electro-Mechanics", MP=CL10A105KO8NNNC, SnapEDA_Link=https://www.snapeda.com/parts/CL10A105KO8NNNC/Samsung/view-part/?ref=snap
D1: "Low-Capacitance ESD Protection USB", Manufacturer=STMicroelectronics, Distributor Link=https://www.mouser.de/ProductDetail/STMicroelectronics/USBLC6-2SC6?qs=po45yt2pPpu%2FhNIlwQdTlg%3D%3D, Manufacturer Part Number=USBLC6-2SC6
D2: library part CMP-1674-00009-1, "LED Uni-Color Yellow, 75 mW, 30 mA, -30 to 85 degC, 2-Pin SMD, RoHS, Tape and Reel", Case Code (Imperial)=0603, Case Code (Metric)=1608, Max Operating Temperature="155 degC", Min Operating Temperature="-55 degC", Package Quantity=5000, Power Rating="100 mW", Resistance="12 kohm", Tolerance=1%, Voltage Rating="50 V", Case\Package=0603, ComponentLink1Description="Manufacturer URL", ComponentLink1URL=http://www.us.liteon.com/, ComponentLink2Description=Datasheet, ComponentLink2URL=http://optoelectronics.liteon.com/upload/download/DS-22-99-0189/S_110_LTST-C190KSKT.pdf, DatasheetVersion="Rev. I, 10/2012", Height="0.45 mm", Length="1.6 mm", Mount="Surface Mount", PackageDescription="2-Pin Surface Mount Device, Body 1.6 x 0.8 mm", PackageReference=C190KSKT, Packaging="Tape and Reel", Pins=2, REACH SVHC="No SVHC", RoHSCompliant=true, Voltage Rating (DC)="50 V", Width="0.8 mm"
D3: library part CMP-1674-00011-2, "LED RED CLEAR CHIP SMD", Case Code (Imperial)=0603, Case Code (Metric)=1608, Color=Red, Forward Current=30mA, Forward Voltage=2.4V, Lens Color=Colorless, Max Operating Temperature=85°C, Min Operating Temperature=-55°C, Package Quantity=1, Power Dissipation=75mW, Reverse Voltage=5V, Test Current=20mA, Case/Package=0603, Depth=0.8mm, Dominant Wavelength=631nm, Height=0.8mm, Illumination Color=Red, Lead Free="Lead Free", Length=1.6mm, Lens Style=Diffused, Lens Transparency=Clear, Luminous Intensity=54mcd, Mount="Surface Mount", Number of Elements=1, Number of LEDs=1, Number of Pins=2, Packaging="Tape and Reel", Power Rating=75mW, Radiation Hardening=No, Viewing Angle=130°, Wavelength=639nm, Width=0.8mm
J1: "CONN RCP USB2.0 TYP C 24P SMD RA", LCSC Part Number=C3197684, Manufacturer=Molex, Supplier Part Number=900-2171790001CT-ND, Category=Connectors, Manufacturer Part Number=217179-0001, Pricing="1=0.9, 10=0.745, 100=0.6212 (USD)", RoHS=No, Stock=7228, Supplier=Digikey
J2: library part CMP-17439-000014-3, "CONN HEADER VERT 3POS 2.5MM", Color=Natural, Contact Resistance=20mR, Current Rating=3A, Flammability Rating="UL94 V-0", Housing Color=White, Insulation Resistance=1GR, Max Operating Temperature=85°C, Max Voltage Rating (AC)=250V, Min Operating Temperature=-25°C, Connector Type=Header, Contact Finish - Mating=TIN, Contact Material=Brass, Contact Plating=Tin, Contact Shape=Square, Contact Type="Male Pin", Depth=5.75mm, Fastening Type=Detent, Gender=Male, Housing Material=Polyamide, Insulation Color=Natural, Insulation Material=Nylon, Lead Free="Lead Free", Lead Pitch=2.5mm, Length=9.9mm, Max Current Rating=3A, Max Voltage Rating (DC)=250V, Mount="Through Hole", Number of Contacts=3, Number of Positions=3, Number of Rows=1, Orientation=Straight, Packaging=Bulk, Pitch=2.5mm, REACH SVHC="No SVHC", Series=XH, Termination=Solder, Voltage Rating=250V, Voltage Rating (AC)=250V, Wire/Cable Gauge=22AWG
J3 J14: library part f2cb566baf1c37ab5a3b8e90bbeafd6, "CONN HEADER VERT 6POS 2.54MM", Color=Black, Contact Resistance=20mR, Current Rating=4A, Max Operating Temperature=75°C, Max Voltage Rating (AC)=250V, Max Voltage Rating (DC)=250.25kV, Min Operating Temperature=0°C, Package Quantity=1, Connector Type="Male Pin", Contact Material=Brass, Contact Mating Length=0.24inch, Contact Plating=Tin, Contact Type="Male Pin", Depth=2.49mm, Gender=Male, Housing Color=Black, Housing Material=Thermoplastic, Length=15.24mm, Mount="Through Hole", Number of Contacts=6, Number of Positions=6, Number of Rows=1, Orientation=Straight, Packaging=Bulk, Pitch=2.54mm, RoHS Compliant=Yes, Series="KK® 42375", Termination=Solder, Voltage Rating=250V
J4 J5 J6 J7 J8 J9: library part CMP-17439-000250-1, "CONN HEADER VERT 4POS 2.5MM", Color=Natural, Contact Resistance=20mR, Current Rating=3A, Flammability Rating="UL94 V-0", Housing Color=White, Insulation Resistance=1GR, Max Operating Temperature=85°C, Max Voltage Rating (AC)=250V, Min Operating Temperature=-25°C, Package Quantity=500, Connector Type=Header, Contact Finish - Mating=TIN, Contact Material=Brass, Contact Plating=Tin, Contact Shape=Square, Contact Type="Male Pin", Depth=5.75mm, Fastening Type=Detent, Gender=Male, Housing Material=Polyamide, Insulation Color=Natural, Insulation Material=Nylon, Lead Free="Lead Free", Lead Pitch=2.5mm, Length=12.4mm, Mated Stacking Heights=9.8mm, Material=Polyamide, Max Current Rating=3A, Max Voltage Rating (DC)=250V, Mount="Through Hole", Number of Contacts=4, Number of Positions=4, Number of Rows=1, Orientation=Straight, Packaging=Bulk, Pitch=2.5mm, REACH SVHC="No SVHC", Series=XH, Termination=Solder, Voltage Rating=250V, Voltage Rating (AC)=250V, Wire/Cable Gauge=22AWG
J10 J11: library part CMP-17439-000076-1, "CONN HEADER VERT 6POS 2.5MM"
J12 J13: "Receptacle, 2.54mm 8-Way, 1 Row, PCB Board-Board, AMPMODU Mod IV Series", Package=None, Centerline_Pitch="2.54 mm[.1 in]", Check_prices=https://www.snapeda.com/parts/5-535541-6/TE+Connectivity+AMP+Connectors/view-part/?ref=eda, EU_RoHS_Compliance=Compliant, MF="TE Connectivity", MP=5-535541-6, Number_of_Positions=8, Product_Type=Connector, SnapEDA_Link=https://www.snapeda.com/parts/5-535541-6/TE+Connectivity+AMP+Connectors/view-part/?ref=snap
J15 J16 J17: library part CMP-02766-001458-1, "CONN HEADER VERT 2POS 2.54MM", Color=Black, Flammability Rating="UL94 V-0", Max Current Rating=7.6A, Max Operating Temperature=125°C, Max Voltage Rating (AC)=550V, Min Operating Temperature=-55°C, Package Quantity=1, Connector Type=Header, Contact Finish - Mating=GOLD, Contact Material=Bronze, Contact Mating Length=0.23inch, Contact Plating=Gold, Contact Shape=Square, Contact Type="Male Pin", Depth=2.54mm, Fastening Type=Pull, Gender=Male, Housing Color=Black, Housing Material=Polyester, Insulation Color=Black, Insulation Material=PBT, Length=5.08mm, Mount="Through Hole", Number of Contacts=2, Number of Positions=2, Number of Rows=1, Orientation=Straight, Packaging=Bulk, Pitch=2.54mm, Radiation Hardening=No, REACH SVHC="No SVHC", RoHS Compliant=Yes, Series=TSW, Termination=Solder
J18: library part CMP-17439-000499-1, "CONN HEADER VERT 2POS 2.5MM", Current Rating=3A, Flammability Rating="UL94 V-0", Insulation Color=Natural, Max Operating Temperature=85°C, Min Operating Temperature=-25°C, Voltage Rating=250V, Connector Type=Header, Contact Finish - Mating=TIN, Contact Material=Brass, Contact Shape=Square, Contact Type="Male Pin", Fastening Type=Detent, Height=7mm, Housing Material=Nylon, Insulation Material=Nylon, Length=7.4mm, Mount="Through Hole", Number of Poles=2, Number of Positions=2, Number of Rows=1, Packaging=Bulk, Pitch=2.5mm, Series=XH, Shape=Straight, Termination=Press-Fit, Width=5.75mm
R1 R2 R3 R4 R5 R6 R7 R8 R11 R12 R13 R14 R15 R16 R17 R18 R19 R20 R21: library part ERJ2RKF1002X, "10 kOhms 1% 0.1W, 1/10W Chip Resistor 0402 (1005 Metric) Automotive AEC-Q200 Thick Film", Package="1005-2 Panasonic", Availability="In Stock", Check_prices=https://www.snapeda.com/parts/ERJ-2RKF1002X/Panasonic%20Electronic%20Components/view-part/78636/?ref=eda, MF=Panasonic, MP=ERJ-2RKF1002X, Price=None, SnapEDA_Link=https://www.snapeda.com/parts/ERJ-2RKF1002X/Panasonic%20Electronic%20Components/view-part/78636/?ref=snap
R9 R10: library part RES_0603, "Resistor SMD 0603"
S2 S3 S5 S7: "Switch Slide SP Side Slide 0.3A 5VDC 10000Cycles Gull Wing SMD T/R", Package=None, Check_prices=https://www.snapeda.com/parts/SSSS811101/ALPS/view-part/?ref=eda, MF=ALPS, MP=SSSS811101, SnapEDA_Link=https://www.snapeda.com/parts/SSSS811101/ALPS/view-part/?ref=snap
S6: library part PTS645SM43SMTR92LFS, "SWITCH TACTILE SPST-NO 0.05A 12V", Case/Package=SMD/SMT, Color=Black, Contact Resistance=100mR, Current Rating=50mA, Max Operating Temperature=60°C, Max Voltage Rating (DC)=12V, Min Operating Temperature=-20°C, Operating Force=160gf, Package Quantity=1, Actuator Length=0.85mm, Actuator Material=Nylon, Actuator Type=Standard, Contact Material=Silver, Contact Plating=Silver, Depth=9mm, Illumination Type=Non-Illuminated, Lead Free="Lead Free", Length=6mm, Max Current Rating=50mA, Mechanical Life=100000Cycles, Mount="Surface Mount", Orientation=Straight, Packaging="Tape and Reel", REACH SVHC="No SVHC", Switch Function=Off-Mom, Termination="Gull Wing", Throw Configuration=SPST, Voltage Rating (DC)=12V
U1: library part CMP-0243-00019-3, "ARM Cortex-M4 32-bit MCU+FPU, 210 DMIPS, 1024 kB Flash, 192 kB Internal RAM, 51 I/Os, 64-pin LQFP, -40 to 85 degC, Tray", I/Os (High Current)=51, Manufacturer=STMicroelectronics, Operating Frequency(F) (Processor speed) (MHz)=168, Supply Voltage(Vcc) max (V)=3.6, Supply Voltage(Vcc) min (V)=1.8, ComponentLink1Description="Manufacturer URL", ComponentLink1URL=http://www.st.com/web/en/home.html, ComponentLink2Description=Datasheet, ComponentLink2URL=http://www.st.com/st-web-ui/static/active/en/resource/technical/document/datasheet/DM00037051.pdf, ComponentLink3Description="Package Specification", ComponentLink3URL=http://www.st.com/st-web-ui/static/active/en/resource/technical/document/datasheet/DM00037051.pdf, Core="ARM Cortex-M4", D/A Converter=2x12-bit, DatasheetVersion="Rev. 4", FLASH Size (Prog) (kB)=1024, Internal RAM Size (kB)=192, Mounting Technology="Surface Mount", PackageDescription="64-Pin Low Profile Quad Flat Package, 10 x 10 mm Body, 0.5 mm Pitch", PackageReference=LQFP64, PackageVersion="Rev. 4, 06/2013", Packing=Tray, PartNumber=STM32F405RGT6
U2: library part CMP-12153-000006-1, "IC REG LINEAR 3.3V 1.2A SOT223", Dropout Voltage=350mV, Manufacturer=STMicroelectronics, Max Junction Temp=+125°C, Max Supply Voltage=18V, Min Supply Voltage=2.6V, Nominal Supply Current=250uA, Output Current=2A, Output Voltage=3.3V, Package=SOT223-0046067, Temperature="-40°C to +125°C", Temperature Range Low=-40°C, Accuracy Percentage=2%, Automotive=No, Category=IC, ComponentLink2Description=Datasheet, ComponentLink2URL=https://www.st.com/resource/en/datasheet/ldl1117.pdf, Device Class L1="Integrated Circuits (ICs)", Device Class L2="Power Management ICs", Device Class L3="Voltage Regulators - Linear", Digikey Description="IC REG LINEAR 3.3V 1.2A SOT223", Height=1.9mm, Ipc Land Pattern Name=SOT230P700X190-4, Lead Free=Yes, Manufacturer Part Number=LDL1117S33R, Mouser Description="LDL1117 Series 1.2 A 3.3 V High PSRR LDO Linear Voltage Regulator-SOT-223", Number Of Outputs=1, Octopart=https://octopart.com/ldl1117s33r-stmicroelectronics-81876163, Output Type=Fixed, RoHS=TRUE, Standoff Height=0.02mm, Temperature Range High=+125°C
U3: "Accelerometer, Gyroscope, 6 Axis Sensor Output", Package=None, Availability=Unavailable, MP=ICM-42688-P, Price=None
U4: library part CMP-04892-000002-1, "IC I2C SW 8CH W/RESET 24TSSOP", Ambient Temperature Range High=+85°C, Ambient Temperature Range Low=-40°C, Manufacturer="Texas Instruments", Max Supply Voltage=5.5V, Min Supply Voltage=1.65V, Nominal Supply Current=2-50uA, Package=PW0024A, Temperature="-40°C to +85°C", Automotive=No, Category=IC, ComponentLink2Description=Datasheet, ComponentLink2URL=http://www.ti.com/lit/ds/symlink/tca9548a.pdf, Device Class L1="Integrated Circuits (ICs)", Device Class L2="Interface ICs", Device Class L3=Multiplexers, Digikey Description="IC I2C SW 8CH W/RESET 24TSSOP", Height=1.2mm, Interface=I2C,SMBus, Ipc Land Pattern Name=SOP65P640X120-24, Lead Free=Yes, Manufacturer Part Number=TCA9548APWR, Mouser Description="Low-Voltage 8-Channel I2C Switch With Reset 24-TSSOP -40 to 85", Mux Demux Ratio=1:8, Number Of Circuits=1, Octopart=https://octopart.com/tca9548apwr-texas+instruments-22266789, RoHS=TRUE, Standoff Height=0.05mm, Temperature Range High=+85°C, Temperature Range Low=-40°C
X1: library part TSX-3225_24.0000MF15X-AC, "Crystal SMD 24MHz 10PPM 7pF 3225", Manufacturer=Epson, Manufacturer Part Number="TSX-3225 24.0000MF15X-AC"

## Free pads (board coordinates)
  round 1.524 hole 2.3: MH(3,93.75) MH(97,93.75)
  round 1.524 hole 3.1: MH(13.5,16) MH(13.5,84) MH(86.5,16) MH(86.5,84)

## Via types
v1: diameter 0.7, hole 0.3, Top_Layer to Bottom_Layer, 92 vias
v2: diameter 0.6, hole 0.3, Top_Layer to Bottom_Layer, 6 vias
v3: diameter 0.8, hole 0.4, Top_Layer to Bottom_Layer, 4 vias
v4: diameter 0.9, hole 0.4, Top_Layer to Bottom_Layer, 2 vias
v5: diameter 0.5, hole 0.3, Top_Layer to Bottom_Layer, 1 vias

## Nets (pads, with @x,y where several pads share a name; then routed paths per layer and width w, separated by ;. In a path a pad name is that pad's centre, name@x,y a point inside that pad or via, vN(x,y) a via of type N, cw(c..) or ccw(c..) an arc to the next point about the centre after c; other vN are vias at no path point)
+3V3: C9.2 C10.2 C11.2 C12.2 C13.2 C14.1 C15.2 C16.1 C17.2 C18.1 C19.2 D2.1 J14.1 J15.2 J16.2 J17.2 J18.2 R7.2 R14.2 S2.1 S3.1 S5.1 S7.1 U1.1 U1.13 U1.19 U1.32 U1.48 U1.64 U3.5 U3.8 | length 351.7
  Top_Layer w0.25: 43.45,25.05 43.65,25.25 U1.13@44.725,25.25 ; U1.1@44.075,31.25 U1.1@44.725,31.25 ; 46.05,34.45 46.05,34.25 46.5,33.8 U1.64@46.5,33.025 ; C10.2@46.975,20.075 46.975,20.125 47.5,20.65 U1.19@47.5,21.975 ; 49.55,13.25 U3.5@49.55,13.885 ; U3.8@51.215,14.05 51.85,14.05 ; U1.32@54,21.975 54.525,21.975 54.75,21.75 ; U1.48@55.775,31.25 56.45,31.25 56.45,31.85
  Top_Layer w0.256: U1.32@54,21.975 54,21.653 U1.32@54.003,21.65
  Top_Layer w0.3: 43.825,32.125 44.075,31.875 U1.1@44.075,31.25 ; C19.2@49.55,12.425 49.55,13.25 ; 51.85,14.05 C17.2@52.675,14.05 ; 54.75,21.75 54.95,21.55 54.95,21.35 ; 56.45,31.85 56.85,32.25 C12.2@57.89,32.25
  Top_Layer w0.35: C15.2@42.65,24.65 42.775,24.775 43.175,24.775 43.45,25.05 ; C9.2@42.75,32.45 42.8,32.45 43.5,32.45 43.825,32.125 ; v1@43.85,33.5 v1(43.85,33.55) ; 46.05,34.45 C13.2@46.05,35.05 ; C10.2@46.975,20.075 C10.2@46.85,19.95 46.85,18.95 45.15,17.25 45.15,14.25 47.883,11.517 48.283,11.517 v1(48.35,11.45) ; v1@48.692,11.517 49.55,12.375 C19.2@49.55,12.425 ; R14.2@51.578,16.98 53.78,16.98 54.85,18.05 C11.2@54.85,19.85 54.975,19.725 54.975,19.125 55.75,18.35 v1(57.95,18.35) 58.017,18.283 58.717,18.283 58.95,18.05 58.95,16.45 55.995,13.495 C18.1@54.35,13.495 ; C11.2@54.85,20.05 54.95,20.15 54.95,21.35 ; S7.1@84.85,29.25 84.45,29.25 83.75,28.55 83.75,25.95 86.35,23.35 86.35,19.55 83.95,17.15 83.95,14.95 85.75,13.15 85.75,11.15 86.877,10.023 88.211,10.023 R7.2@88.263,10.075
  Top_Layer w0.4: S5.1@15.15,33.75 15.3,33.9 16.116,33.9 16.35,34.134 v1(16.35,36.15) ; C14.1@40.92,32.33 C14.1@40.95,32.33 ; C16.1@40.95,24.07 40.935,24.07 40.7,23.835 40.7,23.1 v1(41.3,22.5) ; J18.2@75.875,27.175 78.45,29.75 84.066,29.75 84.3,29.516 84.3,29.4 S7.1@84.45,29.25
  Top_Layer w0.45: C17.2@52.675,14.05 52.725,14.05 53.325,13.45 54.305,13.45 C18.1@54.35,13.495
  Top_Layer w0.5: S2.1@25.15,4.575 25.15,6.696 25.45,6.996 v1(25.45,7.05) ; C16.1@40.95,24.07 40.97,24.05 42,24.05 42.6,24.65 C15.2@42.65,24.65 ; C14.1@41.02,32.4 C14.1@40.95,32.33 40.95,34.05 42.35,35.45 45.507,35.45 45.807,35.15 46,35.15 46.05,35.1 C13.2@46.05,35.05 ; C9.2@42.7,32.4 C9.2@42.75,32.45 ; C9.2@42.8,32.45 v1@43.85,33.5 ; C12.2@57.89,32.25 59.396,32.25 60.096,32.95 v1(60.15,32.95)
  Top_Layer w0.55: C14.1@41.02,32.4 C9.2@42.7,32.4
  Top_Layer w0.6: D2.1@4.375,2.8 10.168,2.8 10.488,2.48 J15.2@10.75,2.48 ; J17.2@19.75,2.48 21.48,2.48 22.05,3.05 22.05,6.35 22.75,7.05 v1(25.45,7.05) ; v3(25.35,36.35) 31.55,36.35 33.05,34.85 38.4,34.85 C14.1@40.92,32.33 ; S3.1@35.875,4.575 35.875,6.748 35.95,6.823 v1(35.95,6.85)
  INT_L2_GND w0.5: v1(41.3,22.5) 43.1,24.3 43.1,32.757 43.85,33.507 v1(43.85,33.55) 45.05,32.35 59.55,32.35 v1(60.15,32.95) 64.25,32.95 67.95,29.25 73.8,29.25 J18.2@75.875,27.175
  INT_L2_GND w0.6: v1(48.35,11.45) 50.25,13.35 58.05,13.35 59.85,15.15 59.85,17.299 59.426,17.723 58.814,18.335 v1@57.992,18.335 ; v1(57.95,18.35) 58.814,18.35 64.25,18.35 72.275,26.375 73.65,26.375 ; J18.2@75.875,27.175 75.625,27.175 74.825,26.375 73.65,26.375 ; J14.1@88.145,2.025 88.145,6.455 73.65,20.95 73.65,26.375
  INT_L2_GND w0.8: J15.2@10.75,2.48 8.25,4.98 8.25,7.75 11.85,11.35 15.05,11.35 16.177,12.477 16.177,16.992 13.719,19.45 13.719,22.619 25.35,34.25 v3(25.35,36.35)
  Bottom_Layer w0.4: v1(16.35,36.15) 16.431,36.15 16.831,36.55 v3@25.042,36.55 ; v1(35.95,6.85) 37.15,8.05 46.55,8.05 48.35,9.85 v1(48.35,11.45)
  Bottom_Layer w0.6: v1(25.45,7.05) 27.15,8.75 34.05,8.75 v1(35.95,6.85)
  Bottom_Layer w1.1: J15.2@10.75,2.48 J16.2@15.25,2.48 J17.2@19.75,2.48
+3V3_DEBUG: J3.1 J17.1 | length 41
  INT_L2_GND w1.1: J17.1@19.75,5.02 57.18,5.02 58.55,3.65 58.55,2.125 J3.1@58.5,2.075
+3V3_EXT: C21.2 C22.1 J2.2 J4.1 J5.1 J6.1 J7.1 J8.1 J9.3 J10.2 J11.2 J15.1 R15.2 R16.2 R17.2 R18.2 R19.2 R20.2 U4.24 | length 449.1
  Top_Layer w0.35: R20.2@45.812,75.575 45.812,78.112 v1(47.15,79.45) ; R19.2@56.138,82.45 56.138,87.038 59.75,90.65 66.95,90.65 67.45,90.15 67.45,88.25 v1(68.05,87.65) ; R17.2@68.7,85.525 68.7,85.537 68.55,85.687 68.55,87.125 68.05,87.625 v1(68.05,87.65) ; R18.2@72.074,85.525 72.074,85.537 72.85,86.314 72.85,88.445 72.645,88.65 69.05,88.65 v1(68.05,87.65)
  Top_Layer w0.5: v4(69.25,45.65) 69.25,38.05 69.85,37.45 71.212,37.45 71.25,37.488 R15.2@71.25,37.5 71.25,38.445 71.455,38.65 73.65,38.65 73.988,38.312 R16.2@73.988,37.5
  Top_Layer w0.6: v1@68.05,87.677 68.75,88.377 J6.1@68.75,94.75 ; v4(69.25,45.65) 67.85,44.25 67.85,35.125 J9.3@69.75,33.225
  Bottom_Layer w0.4: 43.55,98.25 43.55,89.55 47.15,85.95 v1(47.15,79.45)
  Bottom_Layer w0.6: J10.2@18.288,63.712 19.912,63.712 21.05,64.85 21.05,76.05 ; J7.1@21.85,94.85 21.85,98.25 ; J5.1@37.85,94.85 37.85,98.25 ; J4.1@53.25,94.75 53.25,98.25 ; J6.1@68.75,94.75 68.75,98.05 ; 76.15,75.95 85.65,75.95 87.15,74.45 87.15,64.75 86.05,63.65 82.85,63.65 J11.2@82.75,63.75 ; 84.65,98.25 84.65,94.85 J8.1@84.75,94.75
  Bottom_Layer w1.2: J10.2@18.25,63.75 J10.2@18.288,63.712 ; J7.1@21.75,94.75 J7.1@21.85,94.85 ; J2.2@22.75,13.275 22.75,20.35 29.55,27.15 29.55,32.75 28.05,34.25 15.15,34.25 12.35,37.05 12.35,73.75 14.65,76.05 21.05,76.05 22.75,77.75 22.75,85.45 18.2,90 7.7,90 6.5,91.2 6.5,97 7.5,98 37.85,98 43.55,98 53.25,98 68.75,98 84.65,98 91.8,98 93,96.8 93,92 91,90 80.1,90 76.15,86.05 76.15,75.95 76.15,46.353 75.447,45.65 v4(69.25,45.65) ; J5.1@37.75,94.75 J5.1@37.85,94.85
  Bottom_Layer w1.4: J15.1@10.75,5.02 10.75,7.45 12.05,8.75 21.35,8.75 22.75,10.15 J2.2@22.75,13.275
+3V3_USB: C3.1 J16.1 U2.2 U2.4 | length 35.2
  Top_Layer w1: J16.1@15.25,5.02 16.25,6.02 16.25,16.95 13.65,19.55 13.65,23.15 14.25,23.75 16.45,23.75
  Top_Layer w1.1: 16.45,23.75 20.35,27.65
  Top_Layer w1.2: 20.35,27.65 26.775,27.65 U2.4@27.2,28.075
+5V_VBUS: C1.2 C2.1 D1.5 J1.A4B9 J1.B4A9 U2.3 | length 74.3
  INT_L2_GND w1.05: 30.175,19.2 40.65,19.2 44.425,15.425 44.425,12.075 48.9,7.6 56.05,7.6 63.3,14.85 v4(66.35,14.85) 66.35,16.275 67.45,17.375 71.136,17.375 74.093,14.418 74.093,6.093 72.25,4.25 68.45,4.25 v1(68.15,4.55) v1(65.75,4.55)
  other v1: 29.45,18.95 30.85,18.95 30.25,20.15
+6V_EXT: J2.1 J12.1 | length 61.4
  INT_L2_GND w1.7: J2.1@20.25,13.275 20.25,17.65 31.65,29.05 31.65,62.05 26.75,66.95 J12.1@26.75,67.97
BOOT0_SW: R6.1 S5.2 | length 1.9
  Top_Layer w0.4: S5.2@15.15,30.75 R6.1@17.063,30.75
BOOT1_SW: R21.1 S7.2 | length 2.1
  Top_Layer w0.35: R21.1@82.737,32.25 S7.2@84.85,32.25
DRV_STBY: J13.4 R12.2 R20.1 | length 5
  Top_Layer w0.4: J13.4@41.25,75.59 41.258,75.583 44.781,75.583 R20.1@44.788,75.575 R12.2@44.788,74.125
DRV_STBY_R: R12.1 U1.35 | length 60.9
  Top_Layer w0.25: 53.75,25.45 54.45,24.75 U1.35@55.775,24.75
  Top_Layer w0.35: v1(43.9,37.75) 49.75,43.6 49.75,70.175 45.812,74.113 R12.1@45.812,74.125 ; v1(46.85,29.25) 50.45,25.65 53.55,25.65 53.75,25.45
  Bottom_Layer w0.35: v1(43.9,37.75) 43.9,35.2 46.85,32.25 v1(46.85,29.25)
DSP_SCL: J9.2 R15.1 U1.29 | length 53.2
  Top_Layer w0.25: v2(52.05,24.05) 52.117,23.983 52.117,23.783 52.5,23.4 U1.29@52.5,21.975
  Top_Layer w0.3: v1(52.325,10.5) 54.525,10.5 59.775,15.75 59.775,20.55 v1(62.9,23.675)
  Top_Layer w0.35: J9.2@72.25,33.225 72.262,33.237 72.262,37.488 R15.1@72.274,37.5
  Bottom_Layer w0.3: v2(52.05,24.05) 52.05,20.984 51.65,20.584 51.65,17.6 52.75,16.5 52.75,15.5 52.25,15 52.25,10.575 v1(52.325,10.5) ; v1(62.9,23.675) 72.25,33.025 J9.2@72.25,33.225
DSP_SDA: J9.1 R16.1 U1.30 | length 56.1
  Top_Layer w0.25: U1.30@53,21.975 53,23.605 53.15,23.755 v2(53.15,23.85)
  Top_Layer w0.3: v1(53.55,9.175) 54.7,9.175 60.775,15.25 60.775,19.625 v1(63.9,22.75)
  Top_Layer w0.35: J9.1@74.75,33.225 75.012,33.487 R16.1@75.012,37.5
  Bottom_Layer w0.3: v2(53.15,23.85) 53.15,19.35 53.55,18.95 v1(53.55,9.175) ; v1(63.9,22.75) 71.225,30.075 73.675,30.075 74.75,31.15 J9.1@74.75,33.225
ESD_USB_D_N: D1.1 J1.A7 J1.B7 | length 4.9
  Top_Layer w0.281: D1.1@66.15,9.57 66.15,7.839 66.35,7.639 66.35,7.55 ; J1.B7@66.35,6.725 66.35,7.55 ; J1.A7@67.35,6.725 67.341,6.734 67.341,7.459 67.05,7.75 66.55,7.75 66.35,7.55